# Altium PCB 2022-03-20_17-57-44.PcbDoc
Units mil, origin at the board's own origin, x right, y up, seen from the top; angles counter-clockwise.
Board outline 2440 x 2800 mil, 4 copper layers (Top Layer, MidLayer1, MidLayer2, Bottom Layer); 36 components, 19 nets, 84 pads, 111 vias.
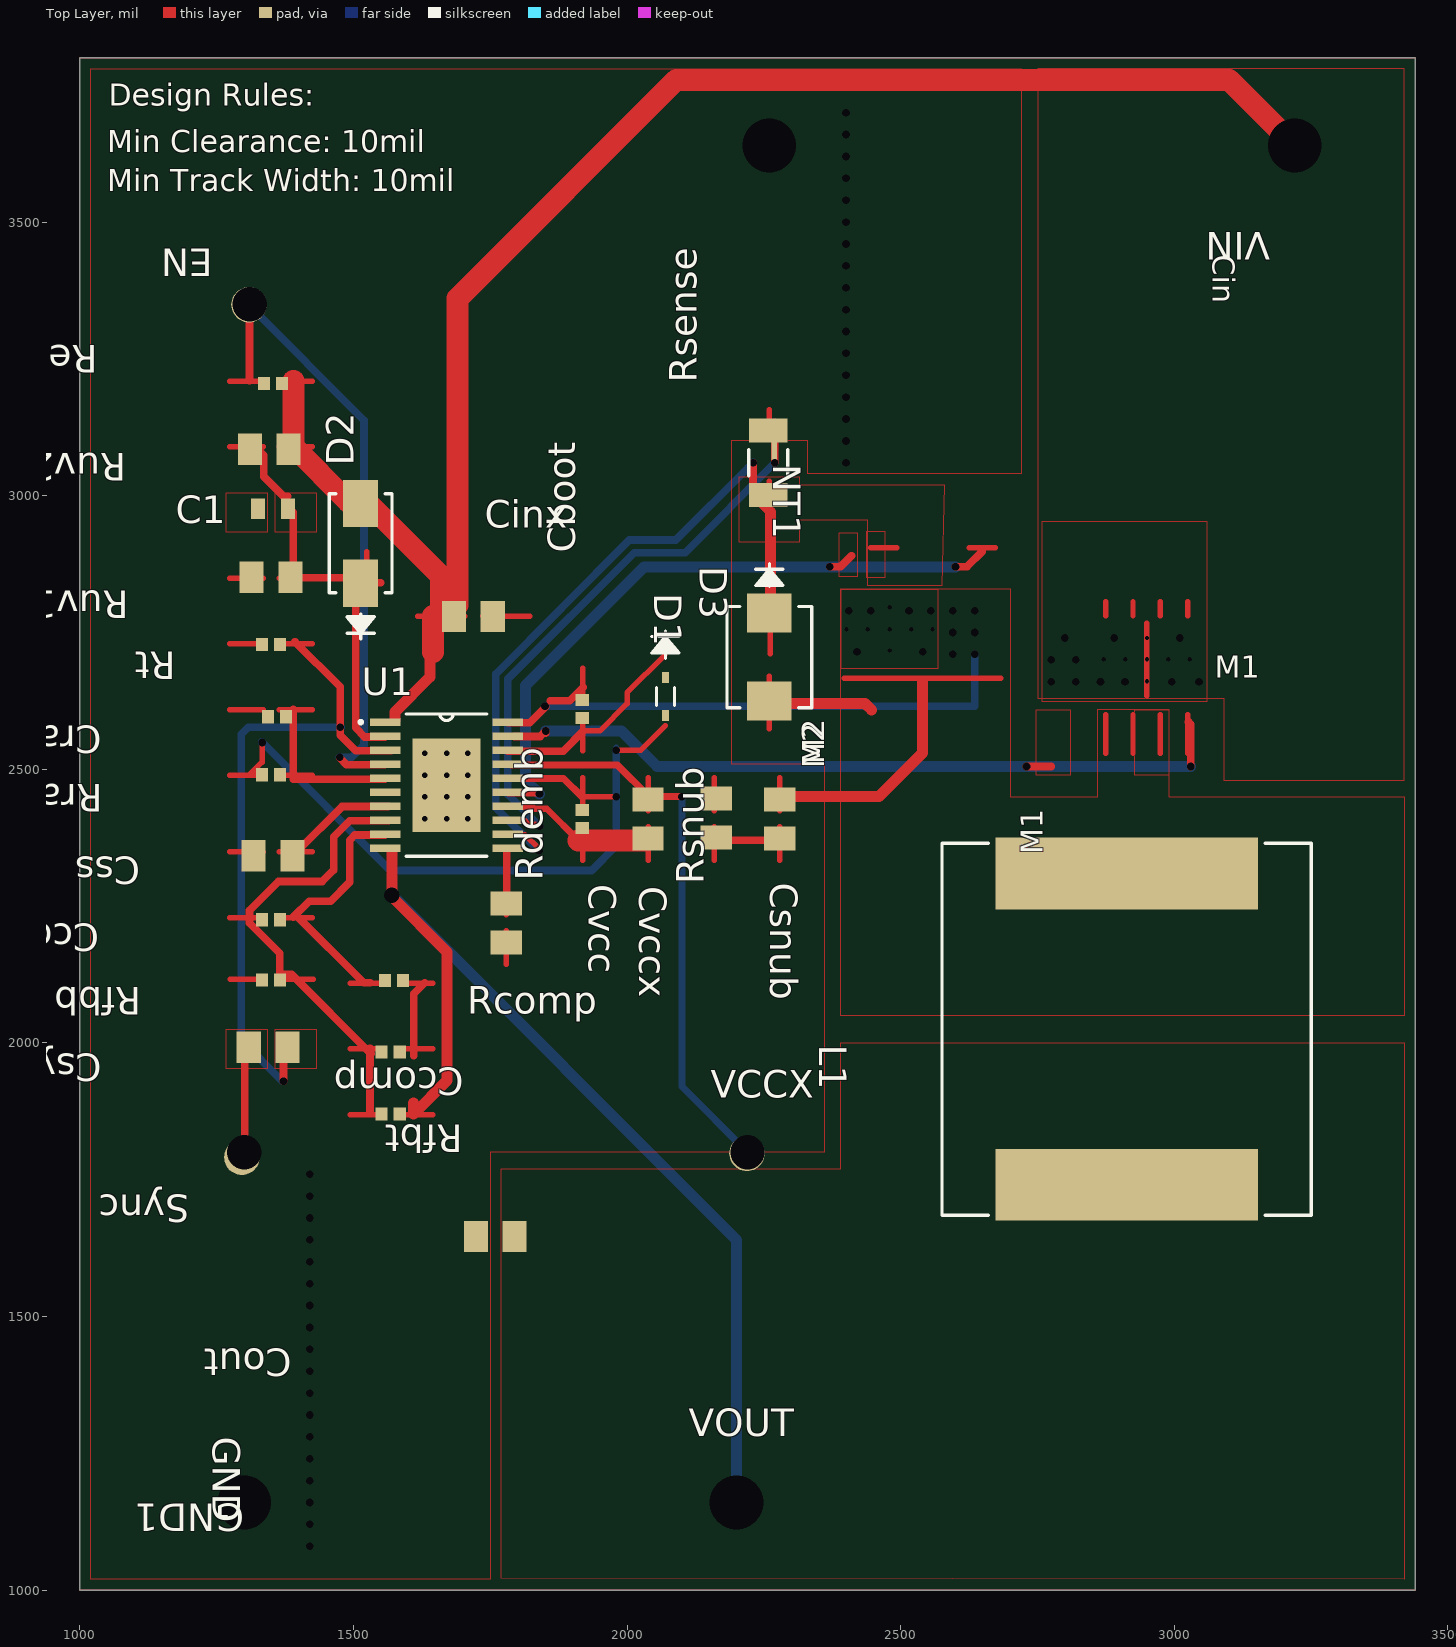
[diagram p0: Top Layer view]
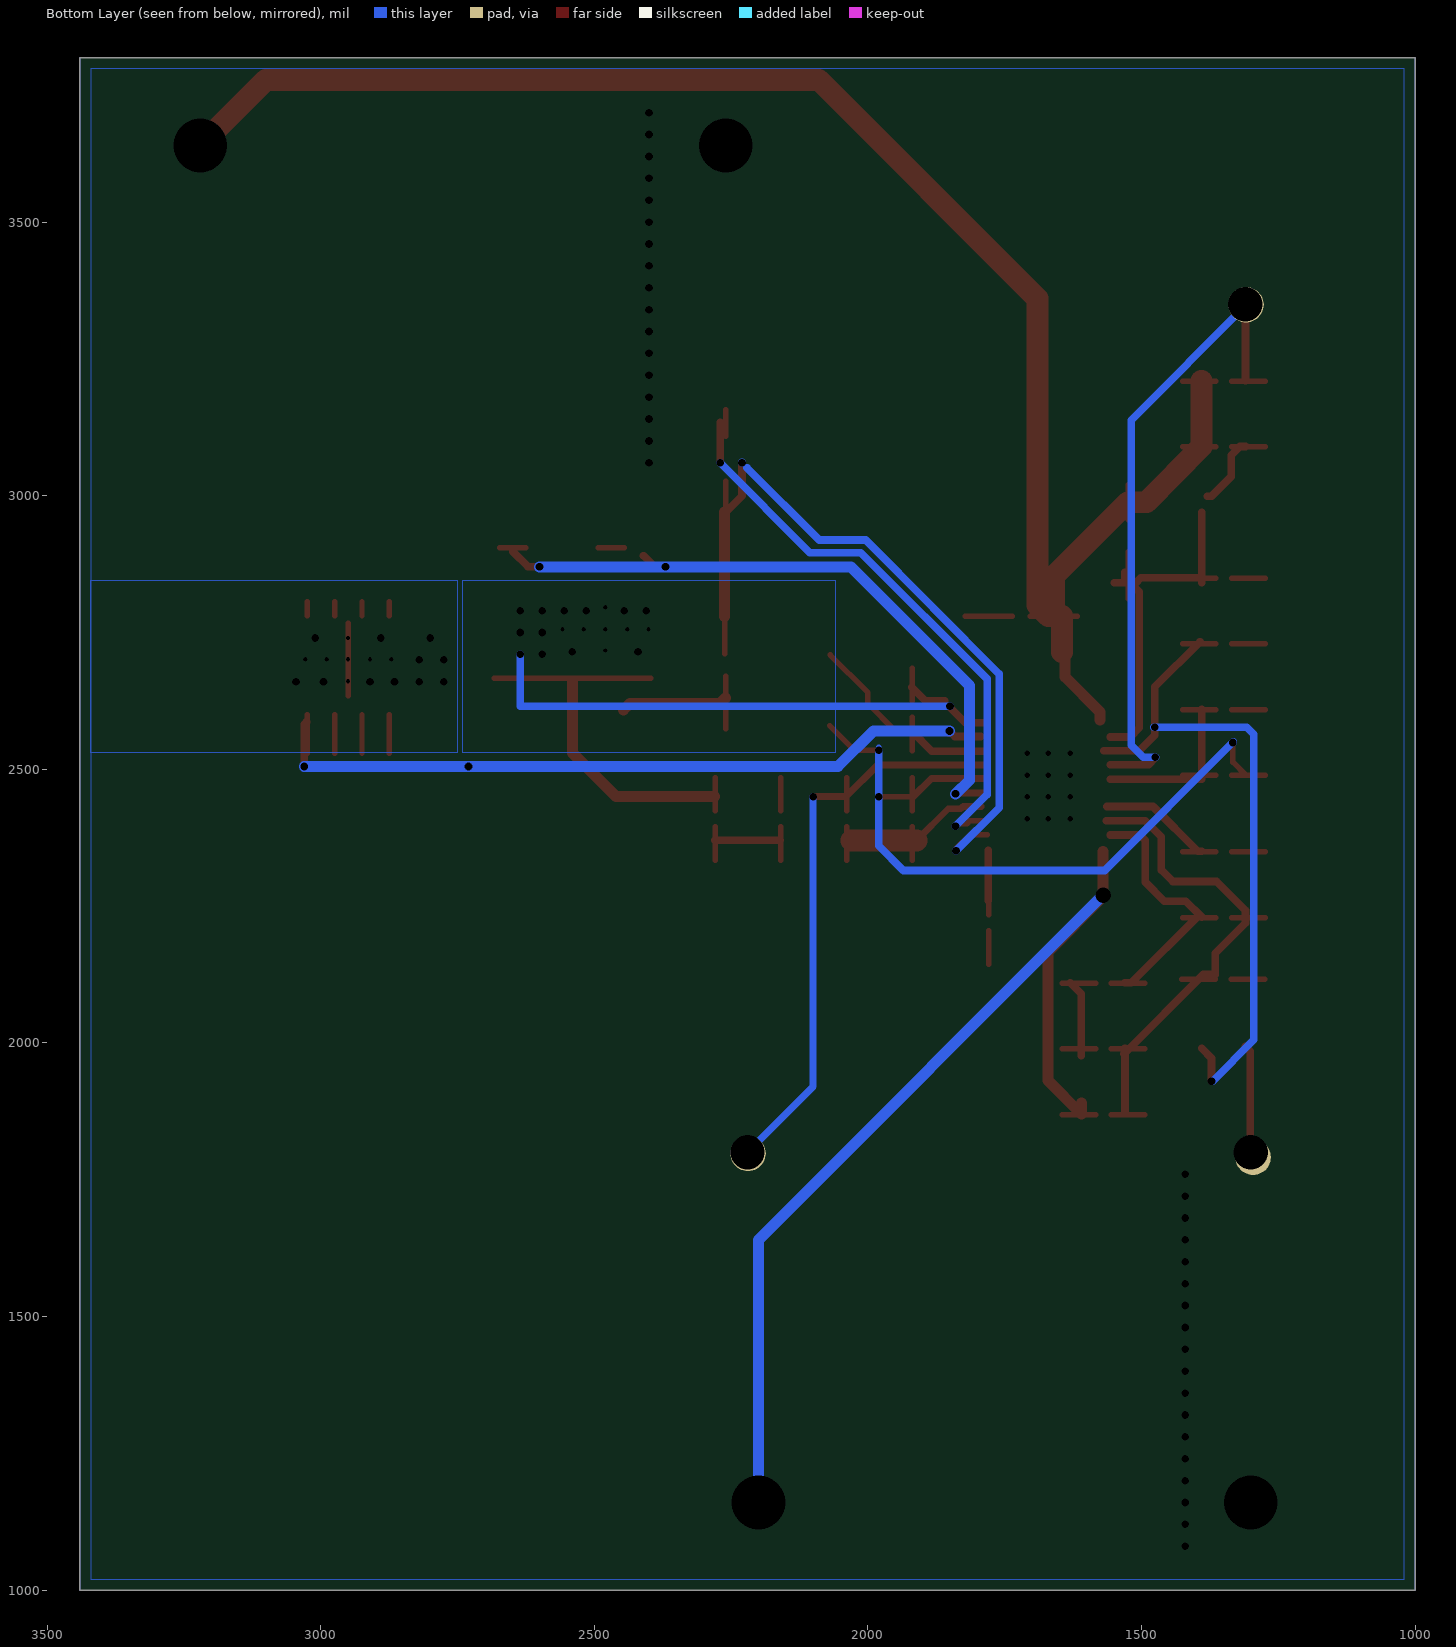
[diagram p1: Bottom Layer view, seen from below]

## Layer stack, top to bottom
Top Layer: signal copper 1.4
Dielectric: core 12.6, FR-4, Dk 4.8
MidLayer1: signal copper 1.4
Dielectric: prepreg 12.6, FR-4, Dk 4.8
MidLayer2: signal copper 1.4
Dielectric: core 12.6, FR-4, Dk 4.8
Bottom Layer: signal copper 1.4

## Board outline
1000,1000 3440,1000 3440,3800 1000,3800

## Design rules (kind name [scope] priority, off if disabled: settings)
PlaneConnect [All] p0: scope1count=1 scope1_0_kind=Board scope1_0_value=Board scope2count=1 scope2_0_kind=Board scope2_0_value=Board commentlength=0 planeconnectstyle=Direct reliefexpansion=20 reliefentries=4 reliefconductorwidth=10 reliefairgap=10
PlaneConnect [All] p1: planeconnectstyle=Direct reliefexpansion=20 reliefentries=4 reliefconductorwidth=10 reliefairgap=10
PolygonConnect [All] p0: scope1count=1 scope1_0_kind=Board scope1_0_value=Board scope2count=1 scope2_0_kind=Board scope2_0_value=Board commentlength=0 connectstyle=Direct reliefconductorwidth=10 reliefentries=4 polygonreliefangle="90 Angle"
PolygonConnect [All] p1: connectstyle=Direct reliefconductorwidth=10 reliefentries=4 polygonreliefangle="90 Angle"

## Components (designator, comment, footprint, x,y, rotation, side; value= is the part's Value field where it differs from the comment)
C1 "" 0603 1353,2976 r0 top
Cboot "" 0402 1918,2610 r90 top
Ccomp "" 0402 1568,1983 r180 top
Ccomp2 "" 0402 1349,2225 r180 top
Cinx "" 0805 1719,2779 r0 top
Cout "" 0805 1759,1646 r180 top
Cramp "" 0402 1360,2596 r180 top
Csnub "" 0805 2279,2409 r270 top
Css "" 0805 1353,2342 r180 top
Csync "" 0805 1344,1992 r180 top
Cvcc "" 0402 1918,2409 r270 top
Cvccx "" 0805 2038,2409 r270 top
D1 "" SOD-523 2070,2633 r270 top
D2 "" SMA 1513,2913 r90 top
D3 "" SMB 2260,2705 r270 top
EN "" TP-1502 1309,3349 r180 top
GND "" TP-1502 2258,3638 r270 top
GND1 "" TP-1502 1300,1158 r180 top
L1 "" IHLP-6767GZ 2913,2025 r270 top
NT1 "" NET_TIED 2269,3099 r270 top
Rcomp "" 0402 1574,2114 r0 top
Rdemb "" 0805 1779,2219 r90 top
Renable "" 0402 1353,3205 r180 top
Rfbb "" 0402 1349,2115 r180 top
Rfbt "" 0402 1568,1870 r180 top
Rramp "" 0402 1349,2490 r180 top
Rsense "" 1206 2258,3060 r90 top
Rsnub "" 0805 2163,2411 r90 top
Rt "" 0402 1349,2728 r180 top
Ruv1 "" 0805 1349,2851 r180 top
Ruv2 "" 0805 1346,3085 r180 top
Sync "" TP-1502 1296,1791 r180 top
U1 "" MXA20A 1670,2471 r0 top
VCCX "" TP-1502 2219,1798 r0 top
VIN "" TP-1502 3219,3638 r180 top
VOUT "" TP-1502 2198,1159 r0 top

## Footprints (in the part's own frame and the unit in brackets; to place one, negate y for a bottom-side part, rotate by r counter-clockwise, add the part's x,y. Pads: shape width x height; smd on the part's side, far side on the other; paste and mask are expansions set on the pad)
0402 [mil]
  rect 22x24 smd: 1(-16.5,0) 2(16.5,0)
0603 [mil]
  rect 26x38 smd: 1(-27.5,0) 2(27.5,0)
0805 [mil]
  rect 44x57 smd: 1(-35.5,0) 2(35.5,0)
1206 [mil]
  rect 44x71 smd: 1(-59,0) 2(59,0)
  silkscreen extent -24,-36 24,36
IHLP-6767GZ [mil]
  rect 131x480 smd: 1(-284.5,0) 2(284.5,0)
  silkscreen extent -340,-338 340,338
MXA20A [mil]
  rect 56x14 smd: 1(-112,115.16) 2(-112,89.57) 3(-112,63.98) 4(-112,38.39) 5(-112,12.8) 6(-112,-12.8) 7(-112,-38.39) 8(-112,-63.98) 9(-112,-89.57) 10(-112,-115.16) 11(112,-115.16) 12(112,-89.57) 13(112,-63.98) 14(112,-38.39) 15(112,-12.8) 16(112,12.8) 17(112,38.39) 18(112,63.98) 19(112,89.57) 20(112,115.16)
  rect 124x171 smd: 21(0,0)
  silkscreen extent -160,-130 74,130
NET_TIED [mil]
  rect 38x10 smd: 1(-15,0) 2(15,0)
SMA [mil]
  rect 86x64 smd: 1(-73,0) 2(73,0)
  silkscreen extent -174,-58 90,58
SMB [mil]
  rect 71x81 smd: 1(-80.5,0) 2(80.5,0)
  silkscreen extent -171,-78 93,78
SOD-523 [mil]
  rect 20x13 smd: 1(-34.5,0) 2(34.5,0)
  silkscreen extent -120,-25 16,25
TP-1502 [mil]
  round 65 hole 32: 1(0,0)

## Via types
v1: diameter 0, hole 14, Top Layer to Bottom Layer, 76 vias
v2: diameter 0, hole 8, Top Layer to Bottom Layer, 14 vias
v3: diameter 0, hole 10, Top Layer to Bottom Layer, 12 vias
v4: diameter 0, hole 98, Top Layer to Bottom Layer, 4 vias
v5: diameter 0, hole 63, Top Layer to Bottom Layer, 3 vias
v6: diameter 0, hole 28, Top Layer to Bottom Layer, 2 vias

## Nets (pads, with @x,y where several pads share a name; then routed paths per layer and width w, separated by ;. In a path a pad name is that pad's centre, name@x,y a point inside that pad or via, vN(x,y) a via of type N, cw(c..) or ccw(c..) an arc to the next point about the centre after c; other vN are vias at no path point)
0: C1.1 Cinx.2 Cout.2 Cramp.2 Css.2 Cvcc.2 Cvccx.1 Cvccx.2 GND1.1 GND.1 NT1.1 NT1.2 Rdemb.1 Rdemb.2 Rfbb.2 Rsense.2 Rsnub.2 Rt.2 Ruv1.2 U1.6 U1.11 U1.13 U1.14 U1.17 U1.21 VCCX.1 | length 3260.9
  Top Layer w10: 1274,2349 Css.2@1335,2349 ; 1274,2609 1335,2609 ; 1274,2729 Rt.2@1335,2729 ; 1274,2849 Ruv1.2@1335,2849 ; 1275,2116 Rfbb.2@1336,2116 ; Cinx.2@1736,2779.5 1822,2779.5 ; 1779,2144 Rdemb.1@1779,2205 ; Rdemb.2@1779,2234 1779,2295 ; U1.13@1788,2406 1814,2406 1819,2400 1832,2400 ; 1919,2334 Cvcc.2@1919,2395 ; 2039,2334 Cvccx.2@2039,2395 ; Cvccx.1@2039,2424 2039,2485 ; 2159,2424 2159,2485 ; Rsense.2@2260,3109 2260,3157
  Top Layer w12: U1.14@1793,2432 1826,2432 1830,2428 1853,2428 1911,2370
  Top Layer w13: U1.17@1788,2508 1982,2508 2040,2450 v1(2100,2450)
  Top Layer w14: Rdemb.2@1780,2260 U1.11@1780,2352 ; v1(2270,3060) Rsense.2@2270,3134
  Top Layer w40: 1911,2370 Cvccx.2@2030,2370
  Bottom Layer w13: v1(2100,2450) 2100,1920 v5(2220,1800)
  Bottom Layer w14: v1(1840,2396) 1782,2454 1782,2665 2013,2896 2106,2896 v1(2270,3060)
  other v1: 1420,1080 1420,1120 1420,1160 1420,1200 1420,1240 1420,1280 1420,1320 1420,1360 1420,1400 1420,1440 1420,1480 1420,1520 1420,1560 1420,1600 1420,1640 1420,1680 1420,1720 1420,1760 2400,3060 2400,3100 2400,3140 2400,3180 2400,3220 2400,3260 2400,3300 2400,3340 2400,3380 2400,3420 2400,3460 2400,3500 2400,3540 2400,3580 2400,3620 2400,3660 2400,3700
  other v3: 1630,2410 1670,2410 1709,2410 1630,2450 1670,2450 1709,2450 1630,2489 1670,2489 1709,2489 1630,2529 1670,2529 1709,2529
  other v4: 1300,1160 2260,3640
1: Cinx.1 Renable.1 Ruv2.1 U1.1 VIN.1 | length 3700.5
  Top Layer w10: Ruv2.1@1364,3089 1425,3089 ; Renable.1@1364,3209 1425,3209 ; 1524,2956 1524,3020 ; 1617,2779.5 Cinx.1@1703,2779.5 ; 2874.5,2781 2874.5,2806 ; 2924.5,2781 2924.5,2806 ; 2949.5,2634 2949.5,2767 ; 2974.5,2781 2974.5,2806 ; 3024.5,2781 3024.5,2806
  Top Layer w20: Ruv2.1@1391,3093 1393,3091 Ruv2.1@1393,3078 ; 1482,2988 1525,2988 1530,2988 ; U1.1@1576,2590 1576,2605 1640,2669 1640,2709
  Top Layer w40: 1390,3210 1390,3090 1491,2988 1525,2988 1660,2853 1660,2780 ; 1645,2714 1645,2780 1670,2780 1690,2800 1690,3360 2090,3760 3100,3760 v4(3220,3640)
  other v1: 2775,2660 2820,2660 2865,2660 2910,2660 2995,2660 3045,2660 2775,2700 2820,2700 2800,2740 2890,2740 3010,2740
  other v2: 2950,2661 2871,2701 2910,2701 2950,2701 2989,2701 3028,2701 2950,2740
2: C1.2 D2.1 Ruv1.1 Ruv2.2 U1.2 | length 986.4
  Top Layer w10: 1274,3089 1335,3089 ; Ruv1.1@1364,2849 1425,2849 ; D2.1@1524,2812 1524,2898
  Top Layer w14: Ruv2.2@1310,3090 1320,3090 1336,3074 1336,3035 1372,2999 1380,2999 ; Ruv1.1@1390,2841 Ruv1.1@1390,2850 ; C1.2@1390,2970 Ruv1.1@1390,2850 ; D2.1@1530,2860 1530,2850 1504,2824 1504,2576 1520,2559 U1.2@1557,2559 ; 1550,2841 1510,2841 1501,2850 Ruv1.1@1390,2850
3: Csync.1 Rt.1 U1.3 | length 1288.9
  Top Layer w10: Rt.1@1364,2729 1425,2729
  Top Layer w14: v1(1372,1930) 1372,1972 Csync.1@1390,1990 ; 1393,2733 1476,2651 1476,2562 1504,2534 ; 1505,2534 U1.3@1569,2534
  Bottom Layer w14: 1295,2563 1295,2006 1370,1930 ; 1295,2564 1308,2577 1477,2577
  other v1: 1476,2577
4: Cramp.1 Rramp.1 U1.5 | length 417
  Top Layer w10: Rramp.1@1364,2489 1425,2489 ; 1364,2609 1425,2609
  Top Layer w14: 1390,2610 1390,2482 U1.5@1557,2482
5: EN.1 Renable.2 U1.4 | length 1227.4
  Top Layer w10: 1274,3209 Renable.2@1335,3209
  Top Layer w14: 1310,3210 EN.1@1310,3345 ; 1475,2521 1487,2508 U1.4@1557,2508
  Bottom Layer w14: EN.1@1310,3347 1519,3138 1519,2544 1497,2522 1474,2522
  other v1: 1475,2522
  other v5: 1310,3350
6: Css.1 U1.7 | length 268
  Top Layer w10: 1364,2349 1425,2349
  Top Layer w14: Css.1@1390,2350 1397,2350 1479,2432 U1.7@1563,2432
7: Ccomp2.1 Rcomp.2 U1.9 | length 846.3
  Top Layer w10: Ccomp2.1@1364,2229 1425,2229 ; 1494,2109 1555,2109 ; 1584,1989 1645,1989 ; Rcomp.2@1584,2109 1645,2109
  Top Layer w14: 1390,2230 1419,2259 1458,2259 1493,2294 1493,2370 1502,2380 U1.9@1557,2380 ; 1394,2234 1519,2110 1530,2110 ; 1610,1977 1610,1990 1610,2090 1630,2110
8: Ccomp2.2 Ccomp.1 Rfbb.1 Rfbt.2 U1.8 | length 1085.5
  Top Layer w10: 1274,2229 Ccomp2.2@1335,2229 ; Rfbb.1@1365,2116 1426,2116 ; 1494,1869 Rfbt.2@1555,1869 ; 1494,1989 1555,1989
  Top Layer w14: 1530,1873 1530,1982 ; 1530,1990 1530,1982 ; 1532,1980 1530,1982 ; U1.8@1564,2406 1493,2406 1464,2377 1464,2316 1443,2295 1363,2295 1310,2242 1310,2230 1310,2219 1365,2164 1365,2125 1387,2125 1530,1982
9: Cout.1 L1.2 Rfbt.1 U1.10 VOUT.1 | length 2009.1
  Top Layer w10: Rfbt.1@1584,1869 1645,1869
  Top Layer w20: U1.10@1570,2350 v6(1570,2270) 1570,2267 1671,2166 1671,1931 1610,1870 1610,1890
  Bottom Layer w20: v6(1570,2270) 2200,1640 VOUT.1@2200,1150
  other v4: 2200,1160
  other v6: 2200,1160
10: D3.1 Rsense.1 U1.12 | length 1628.7
  Top Layer w10: U1.12@1782,2380 1813,2380 1839,2355 v1(1839,2351) ; 2260,2920 2260,3026 ; 2261.5,2711 2261.5,2847 ; 2445,2905 2493,2905
  Top Layer w14: v1(2230,3060) 2230,3000 2260,2970
  Top Layer w20: D3.1@2262,2779 2262,2970
  Bottom Layer w14: v1(1839,2351) 1760,2430 1760,2674 2004,2919 2089,2919 2221,3051 ; v1(2230,3060) 2230,3061
11: U1.15 | length 1297.8
  Top Layer w10: 2625,2905 2673,2905
  Top Layer w13: U1.15@1782,2457 1837,2457
  Top Layer w14: v1(2370,2870) 2390,2870 2410,2890 ; v1(2600,2870) 2621,2870 2649,2898
  Bottom Layer w14: 1839,2455 v1(1840,2455)
  Bottom Layer w20: v1(1840,2455) 1814,2480 1814,2653 2031,2870 v1(2600,2870)
12: Cboot.2 Csnub.1 L1.1 U1.20 | length 2366.6
  Top Layer w10: Cboot.2@1919,2624 1919,2685 ; 2259.5,2574 2259.5,2670 ; Csnub.1@2279,2424 2279,2485 ; 2397,2666 2683,2666 ; 2874.5,2529 2874.5,2600 ; 2924.5,2529 2924.5,2600 ; 2974.5,2529 2974.5,2600
  Top Layer w14: U1.20@1782,2585 1822,2585 1851,2614 ; 1860,2625 1895,2625 1920,2650
  Top Layer w20: 2260,2630 2270,2620 2435,2620 2447,2608 ; Csnub.1@2280,2450 2460,2450 2540,2530 2540,2659
  Bottom Layer w14: v1(1850,2615) 2635,2615 v1(2635,2710)
  other v1: 2595,2710 2420,2715 2540,2715 2595,2750 2635,2750 2405,2790 2445,2790 2515,2790 2555,2790 2595,2790 2635,2790
  other v2: 2480,2717 2401,2756 2440,2756 2480,2756 2519,2756 2558,2756 2480,2796
13: U1.19 | length 1463.1
  Top Layer w10: 3024.5,2529 3024.5,2600
  Top Layer w14: U1.19@1794,2560 1841,2560 v1(1851,2570) ; 1851,2566 1851,2568 ; v1(2730,2505) 2775,2505 ; 3026,2586 3026,2587 ; v1(3030,2505) 3030,2582
  Bottom Layer w20: v1(1851,2570) 1990,2570 2055,2505 v1(2730,2505) v1(3030,2505)
14: Cboot.1 D1.1 D2.2 U1.18 | length 432.6
  Top Layer w10: 1919,2534 Cboot.1@1919,2595 ; 1920,2570 1950,2570 2000,2620 2000,2640 2069,2709
  Top Layer w14: U1.18@1782,2533 1883,2533 1920,2570
15: Cvcc.1 D1.2 D3.2 Rramp.2 U1.16 | length 1459.8
  Top Layer w10: 1274,2489 Rramp.2@1335,2489 ; 1310,2490 1333,2513 v1(1333,2549) ; 1917,2450 1920,2450 v1(1980,2450) ; Cvcc.1@1919,2424 1919,2485 ; 1985,2535 v1(1980,2535) 2025,2535 2070,2580
  Top Layer w13: U1.16@1782,2483 1884,2483 1917,2450
  Bottom Layer w10: v1(1980,2535) 1980,2540
  Bottom Layer w14: 1332,2550 v1(1333,2549) 1567,2315 1935,2315 1980,2360 v1(1980,2450) v1(1980,2535)
16: Ccomp.2 Rcomp.1
27: Csnub.2 Rsnub.1 | length 242
  Top Layer w10: 2159,2334 Rsnub.1@2159,2395 ; 2279,2334 Csnub.2@2279,2395
  Top Layer w14: Rsnub.1@2160,2370 Csnub.2@2280,2370
36: Csync.2 Sync.1 | length 197.7
  Top Layer w14: Sync.1@1301,1800 1301,1985 Csync.2@1310,1994
  other v5: 1300,1800

## Polygon pours and split planes (outlines as drawn)
36 on Top Layer " " (solid, pour order 0): 1267,1953 1267,2025 1342,2025 1342,1953
3 on Top Layer " " (solid, pour order 1): 1357,1953 1357,2025 1432,2025 1432,1953
2 on Top Layer " " (solid, pour order 2): 1357,2933 1357,3005 1432,3005 1432,2933
1 on Top Layer " " (solid, pour order 3): 2759,2623 2759,2953 3059,2953 3059,2623
12 on Top Layer " " (solid, pour order 4): 2928,2489 2928,2609 2990,2609 2990,2489
13 on Top Layer " " (solid, pour order 5): 2748,2489 2748,2609 2810,2609 2810,2489
11 on Top Layer " " (solid, pour order 6): 2388,2852 2388,2932 2421,2932 2421,2852
10 on Top Layer " " (solid, pour order 7): 2438,2850 2438,2935 2471,2935 2471,2850
12 on Top Layer " " (solid, pour order 8): 2391,2684 2391,2829 2568,2829 2568,2684
9 on Top Layer " " (solid, pour order 14): 1770,1022 1770,1770 2390,1770 2390,2000 3400,2000 3420,2000 3420,1020
1 on Top Layer " " (solid, pour order 15): 2750,3780 2750,2630 3090,2630 3090,2480 3420,2480 3420,3780
12 on Top Layer " " (solid, pour order 16): 2390,2830 2700,2830 2700,2450 2860,2450 2860,2610 2990,2610 2990,2450 3420,2450 3420,2050 2390,2050
10 on Top Layer " " (solid, pour order 17): 2205,3035 2315,3035 2315,3020 2580,3020 2575,2835 2440,2835 2440,2955 2315,2955 2315,2915 2205,2915
0 on Top Layer " " (solid, pour order 20): 2275,3106 2275,3094 2265,3094 2265,3106
0 on Top Layer " " (solid, pour order 21): 1267,2933 1267,3005 1342,3005 1342,2933
0 on Top Layer " " (solid, pour order 22): 2265,3085 2265,3095 2275,3095 2275,3085
0 on Top Layer " " (solid, pour order 23): 2265,3105 2265,3115 2275,3115 2275,3105
0 on Top Layer " " (solid, pour order 25): 1020,3780 2720,3780 2720,3040 2330,3040 2330,3070 2330,3100 2190,3100 2190,2510 2360,2510 2360,1800 1750,1800 1750,1020 1020,1020
12 on Bottom Layer " " (solid, pour order 18): 2740,2845 2060,2845 2060,2530 2740,2530
1 on Bottom Layer " " (solid, pour order 19): 3420,2845 2750,2845 2750,2530 3420,2530
0 on Bottom Layer " " (solid, pour order 26): 1020,1020 1020,3780 3420,3780 3420,1020
1 on MidLayer2 " " (solid, pour order 9): 3420,2845 2750,2845 2750,2530 3420,2530
12 on MidLayer2 " " (solid, pour order 10): 2740,2845 2060,2845 2060,2530 2740,2530
1 on MidLayer2 " " (solid, pour order 11): 1020,1020 3420,1020 3420,3780 1020,3780
1 on MidLayer1 " " (solid, pour order 12): 3420,2845 2750,2845 2750,2530 3420,2530
12 on MidLayer1 " " (solid, pour order 13): 2740,2530 2740,2845 2060,2845 2060,2530
0 on MidLayer1 " " (solid, pour order 24): 1020,1020 3420,1020 3420,3780 1020,3780

## Other copper
Multi-Layer:
  the board outline again, w1

## Silkscreen, mask and mechanical layers (free items; w line width, h text height)
Top Overlay:
  text "Design Rules:" at 1053,3713 h40
  text "Min Clearance: 10mil" at 1050,3628 h40
  text "Min Track Width: 10mil" at 1050,3556 h40
  text "Cin" at 3070,3440 h40 r270
  text "M1" at 3074,2667 h40
  text "M2" at 2360,2509 h40 r90
  text "M2" at 2360,2502 h40 r90
  text "M1" at 2760,2345 h40 r90